# EAGLE board CT_schematic (EAGLE 7.6.0)

Size 100 x 80 mm. Coordinates in mm from the lower left corner, seen from the top.
Outline: 0,0 100,0 100,80 0,80 0,0
Copper layers (1*16): Top 0.035mm / dielectric 1.5mm / Bottom 0.035mm
Design rules "default": minimum track width 10mil, minimum drill 24mil, track to track 8mil, track to pad 8mil, pad to pad 8mil, via to via 8mil, smd to smd 8mil, copper to edge 40mil, drill to drill 8mil, minimum pad ring 10mil, minimum via ring 8mil, stop-mask expansion 4mil, vias tented up to drill 0mil, thermal gap 10mil

## Footprints (pad centres in the part's own frame; a part is rotated, then mirrored left to right if it is on the bottom)
C0603 = smd 0.8 x 0.8: 1 -0.762,0; 2 0.762,0
C0402 = smd 0.5 x 0.5: 1 -0.508,0; 2 0.508,0
C1210 = smd 1.2 x 2.5: 1 -1.524,0; 2 1.524,0
C0805 = smd 1.2 x 1.3: 1 -1.016,0; 2 1.016,0
C1206 = smd 1.3 x 1.6: 1 -1.524,0; 2 1.524,0
L0603 = smd 0.8 x 0.8: 1 -0.762,0; 2 0.762,0
DR1040 = smd 1.6 x 3.2: 1 -4.458,0; 2 4.458,0
R0603 = smd 0.8 x 0.8: 1 -0.762,0; 2 0.762,0
LQFP144 = smd 0.35 x 1.35: 1 -8.75,-10.625; 2 -8.25,-10.625; 3 -7.75,-10.625; 4 -7.25,-10.625; 5 -6.75,-10.625; 6 -6.25,-10.625; 7 -5.75,-10.625; 8 -5.25,-10.625; 9 -4.75,-10.625; 10 -4.25,-10.625; 11 -3.75,-10.625; 12 -3.25,-10.625; 13 -2.75,-10.62; 14 -2.25,-10.625; 15 -1.75,-10.625; 16 -1.25,-10.625; 17 -0.75,-10.625; 18 -0.25,-10.625; 19 0.25,-10.625; 20 0.75,-10.625; 21 1.25,-10.625; 22 1.75,-10.625; 23 2.25,-10.625; 24 2.75,-10.62; 25 3.25,-10.625; 26 3.75,-10.625; 27 4.25,-10.625; 28 4.75,-10.625; 29 5.25,-10.625; 30 5.75,-10.625; 31 6.25,-10.625; 32 6.75,-10.625; 33 7.25,-10.625; 34 7.75,-10.625; 35 8.25,-10.625; 36 8.75,-10.625; 73 8.75,10.625; 74 8.25,10.625; 75 7.75,10.625; 76 7.25,10.625; 77 6.75,10.625; 78 6.25,10.625; 79 5.75,10.625; 80 5.25,10.625; 81 4.75,10.625; 82 4.25,10.625; 83 3.75,10.625; 84 3.25,10.625; 85 2.75,10.625; 86 2.25,10.625; 87 1.75,10.625; 88 1.25,10.625; 89 0.75,10.625; 90 0.25,10.625; 91 -0.25,10.625; 92 -0.75,10.625; 93 -1.25,10.625; 94 -1.75,10.625; 95 -2.25,10.625; 96 -2.75,10.625; 97 -3.25,10.625; 98 -3.75,10.625; 99 -4.25,10.625; 100 -4.75,10.625; 101 -5.25,10.625; 102 -5.75,10.625; 103 -6.25,10.625; 104 -6.75,10.625; 105 -7.25,10.625; 106 -7.75,10.625; 107 -8.25,10.625; 108 -8.75,10.625 | smd 1.35 x 0.35: 37 10.625,-8.75; 38 10.625,-8.25; 39 10.625,-7.75; 40 10.625,-7.25; 41 10.625,-6.75; 42 10.625,-6.25; 43 10.625,-5.75; 44 10.625,-5.25; 45 10.625,-4.75; 46 10.625,-4.25; 47 10.625,-3.75; 48 10.625,-3.25; 49 10.625,-2.75; 50 10.625,-2.25; 51 10.625,-1.75; 52 10.625,-1.25; 53 10.625,-0.75; 54 10.625,-0.25; 55 10.625,0.25; 56 10.625,0.75; 57 10.625,1.25; 58 10.625,1.75; 59 10.625,2.25; 60 10.625,2.75; 61 10.625,3.25; 62 10.625,3.75; 63 10.625,4.25; 64 10.625,4.75; 65 10.625,5.25; 66 10.625,5.75; 67 10.625,6.25; 68 10.625,6.75; 69 10.625,7.25; 70 10.625,7.75; 71 10.625,8.25; 72 10.625,8.75; 109 -10.625,8.75; 110 -10.625,8.25; 111 -10.625,7.75; 112 -10.625,7.25; 113 -10.625,6.75; 114 -10.625,6.25; 115 -10.625,5.75; 116 -10.625,5.25; 117 -10.625,4.75; 118 -10.625,4.25; 119 -10.625,3.75; 120 -10.625,3.25; 121 -10.625,2.75; 122 -10.625,2.25; 123 -10.625,1.75; 124 -10.625,1.25; 125 -10.625,0.75; 126 -10.625,0.25; 127 -10.625,-0.25; 128 -10.625,-0.75; 129 -10.625,-1.25; 130 -10.625,-1.75; 131 -10.625,-2.25; 132 -10.625,-2.75; 133 -10.625,-3.25; 134 -10.625,-3.75; 135 -10.625,-4.25; 136 -10.625,-4.75; 137 -10.625,-5.25; 138 -10.625,-5.75; 139 -10.625,-6.25; 140 -10.625,-6.75; 141 -10.625,-7.25; 142 -10.625,-7.75; 143 -10.625,-8.25; 144 -10.625,-8.75
SOIC-8 = smd 1.6 x 0.6: 1 -2.7,1.905 | smd 1.55 x 0.6: 2 -2.7,0.635; 3 -2.7,-0.635; 4 -2.7,-1.905; 5 2.7,-1.905; 6 2.7,-0.635; 7 2.7,0.635; 8 2.7,1.905
VFBGA48 = smd 0.35 x 0.35: A1 -1.875,2.625; A2 -1.125,2.625; A3 -0.375,2.625; A4 0.375,2.625; A5 1.125,2.625; A6 1.875,2.625; B1 -1.875,1.875; B2 -1.125,1.875; B3 -0.375,1.875; B4 0.375,1.875; B5 1.125,1.875; B6 1.875,1.875; C1 -1.875,1.125; C2 -1.125,1.125; C3 -0.375,1.125; C4 0.375,1.125; C5 1.125,1.125; C6 1.875,1.125; D1 -1.875,0.375; D2 -1.125,0.375; D3 -0.375,0.375; D4 0.375,0.375; D5 1.125,0.375; D6 1.875,0.375; E1 -1.875,-0.375; E2 -1.125,-0.375; E3 -0.375,-0.375; E4 0.375,-0.375; E5 1.125,-0.375; E6 1.875,-0.375; F1 -1.875,-1.125; F2 -1.125,-1.125; F3 -0.375,-1.125; F4 0.375,-1.125; F5 1.125,-1.125; F6 1.875,-1.125; G1 -1.875,-1.875; G2 -1.125,-1.875; G3 -0.375,-1.875; G4 0.375,-1.875; G5 1.125,-1.875; G6 1.875,-1.875; H1 -1.875,-2.625; H2 -1.125,-2.625; H3 -0.375,-2.625; H4 0.375,-2.625; H5 1.125,-2.625; H6 1.875,-2.625
TST-110-05-T-D-RA = drill 1 pad 1.7 square: 1 0,0 | drill 1 pad 1.7: 2 0,2.54; 3 2.54,0; 4 2.54,2.54; 5 5.08,0; 6 5.08,2.54; 7 7.62,0; 8 7.62,2.54; 9 10.16,0; 10 10.16,2.54; 11 12.7,0; 12 12.7,2.54; 13 15.24,0; 14 15.24,2.54; 15 17.78,0; 16 17.78,2.54; 17 20.32,0; 18 20.32,2.54; 19 22.86,0; 20 22.86,2.54
FCI_10118193-0001LF = smd 0.4 x 1.35: 1 -1.3,2.675; 2 -0.65,2.675; 3 0,2.675; 4 0.65,2.675; 5 1.3,2.675 | smd 1.6 x 1.4: 6 -3.2,2.45; 7 3.2,2.45 | smd 1.9 x 1.9: 8 -1.2,0; 9 1.2,0 | hole 0.5: -3.3,0; 3.3,0
SOT143B = smd 1 x 0.7: 1 -0.75,-1 | smd 0.6 x 0.7: 2 0.95,-1; 3 0.95,1; 4 -0.95,1
QFN-28 = smd 0.813 x 0.305: 1 -2.451,1.5; 2 -2.451,1; 3 -2.451,0.5; 4 -2.451,0; 5 -2.451,-0.5; 6 -2.451,-1; 7 -2.451,-1.5; 15 2.451,-1.5; 16 2.451,-1; 17 2.451,-0.5; 18 2.451,0; 19 2.451,0.5; 20 2.451,1; 21 2.451,1.5 | smd 0.305 x 0.813: 8 -1.5,-2.451; 9 -1,-2.451; 10 -0.5,-2.451; 11 0,-2.451; 12 0.5,-2.451; 13 1,-2.451; 14 1.5,-2.451; 22 1.5,2.451; 23 1,2.451; 24 0.5,2.451; 25 0,2.451; 26 -0.5,2.451; 27 -1,2.451; 28 -1.5,2.451 | smd 3.607 x 3.607: 29 0,0
SJ-43515TS-SMT-TR = smd 2.2 x 3: 1 0.6,-7.4; 4 3.4,-7.4 | smd 3 x 3: 2 12.8,-7.4; 5 17,-3 | smd 2 x 3: 3 5.3,0; 6 2.5,0 | drill 1.8: P$7 4.5,-3.69; P$8 11.54,-3.69
ABLS-12.288MHZ-B4-T = smd 5.6 x 2.8: 1 -3.81,0; 2 5.69,0
ASEK = smd 1.4 x 1: 1 -1.1,-0.8; 2 1.1,-0.8; 3 1.1,0.8; 4 -1.1,0.8
ASFL1 = smd 1.7 x 1.5: 1 -1.27,-1.1; 2 1.27,-1.1; 3 1.27,1.1; 4 -1.27,1.1
TSOT-23-5 = smd 1.3 x 0.62: 1 -1.31,0.95; 2 -1.31,0; 3 -1.31,-0.95; 4 1.31,-0.95; 5 1.31,0.95
DFN8_2X3MC = smd 0.813 x 0.305: 1 -1.398,0.75; 2 -1.398,0.25; 3 -1.398,-0.25; 4 -1.398,-0.75; 5 1.398,-0.75; 6 1.398,-0.25; 7 1.398,0.25; 8 1.398,0.75 | smd 1.753 x 1.549: 9 0,0
JST-2-SMD = smd 1 x 4.6: 1 -1,-3.7; 2 1,-3.7 | smd 1.6 x 3.4: NC1 -3.4,1.5; NC2 3.4,1.5
SON-6 = smd 0.55 x 0.3: 1 -0.355,0.5 | smd 0.52 x 0.3: 2 -0.37,0; 3 -0.37,-0.5; 4 0.37,-0.5; 5 0.37,0; 6 0.37,0.5
SW_4-1437565-2 = smd 1.4 x 2.1: 1 -2.23,4.55; 2 -2.23,-4.55; 3 2.23,4.55; 4 2.23,-4.55
LGM67K-G1J2-24-Z = smd 0.8 x 1.4: A -2,0; C 0,0
NC7SZ125M5X = smd 1.3 x 0.7: 1 -1.3,0.95; 2 -1.3,0; 3 -1.3,-0.95; 4 1.3,-0.95; 5 1.3,0.95

## Placement (x,y rotation side)
C1  1e-06  [C0603]  -74.93,80.01 0 top  (outside the outline)
C2  1e-07  [C0603]  -78.74,80.01 0 top  (outside the outline)
C3  1e-07  [C0603]  -82.55,80.01 0 top  (outside the outline)
C4  1e-07  [C0603]  -15.24,85.09 0 top  (outside the outline)
C5  1e-07  [C0603]  -19.05,85.09 0 top  (outside the outline)
C6  1e-07  [C0603]  -22.86,85.09 0 top  (outside the outline)
C7  1e-07  [C0603]  -26.67,85.09 0 top  (outside the outline)
C8  1e-07  [C0603]  -30.48,85.09 0 top  (outside the outline)
C9  1e-07  [C0603]  -34.29,85.09 0 top  (outside the outline)
C10  1e-07  [C0603]  -38.1,85.09 0 top  (outside the outline)
C11  1e-07  [C0603]  -41.91,85.09 0 top  (outside the outline)
C12  1e-07  [C0603]  -45.72,85.09 0 top  (outside the outline)
C13  1e-07  [C0603]  -49.53,85.09 0 top  (outside the outline)
C14  4.7e-06  [C0603]  -59.69,80.01 0 top  (outside the outline)
C15  2.2e-06  [C0603]  -63.5,80.01 0 top  (outside the outline)
C16  2.2e-06  [C0603]  -67.31,80.01 0 top  (outside the outline)
C17  1e-08  [C0603]  -53.34,85.09 0 top  (outside the outline)
C18  1e-06  [C0603]  -57.15,85.09 0 top  (outside the outline)
C19  1e-07  [C0603]  -60.96,85.09 0 top  (outside the outline)
C20  1e-06  [C0603]  -64.77,85.09 0 top  (outside the outline)
C21  1e-08  [C0402]  -31.75,90.17 0 top  (outside the outline)
C22  1e-08  [C0402]  -35.56,90.17 0 top  (outside the outline)
C23  1e-07  [C0402]  -39.37,90.17 0 top  (outside the outline)
C24  2.2e-06  [C0603]  -71.12,80.01 0 top  (outside the outline)
C25  1e-07  [C0402]  -43.18,90.17 0 top  (outside the outline)
C26  2.2e-05  [C1210]  -76.2,60.96 0 top  (outside the outline)
C27  2.2e-05  [C1210]  -82.55,60.96 0 top  (outside the outline)
C28  1e-09  [C0402]  -46.99,90.17 0 top  (outside the outline)
C29  1e-09  [C0402]  -50.8,90.17 0 top  (outside the outline)
C30  1e-07  [C0402]  -54.61,90.17 0 top  (outside the outline)
C31  1e-07  [C0402]  -58.42,90.17 0 top  (outside the outline)
C32  1e-07  [C0402]  -62.23,90.17 0 top  (outside the outline)
C33  1e-07  [C0402]  -66.04,90.17 0 top  (outside the outline)
C34  1e-07  [C0402]  -69.85,90.17 0 top  (outside the outline)
C35  1e-05  [C0805]  -40.64,68.58 0 top  (outside the outline)
C36  1e-05  [C0805]  -45.72,68.58 0 top  (outside the outline)
C37  1e-05  [C0805]  -50.8,68.58 0 top  (outside the outline)
C38  1e-05  [C0805]  -55.88,68.58 0 top  (outside the outline)
C39  1e-05  [C0805]  -60.96,68.58 0 top  (outside the outline)
C40  2.2e-11  [C0402]  -24.13,90.17 0 top  (outside the outline)
C41  2.2e-11  [C0402]  -27.94,90.17 0 top  (outside the outline)
C42  1e-08  [C0402]  -73.66,90.17 0 top  (outside the outline)
C43  1e-08  [C0402]  -77.47,90.17 0 top  (outside the outline)
C44  1e-05  [C0805]  -66.04,68.58 0 top  (outside the outline)
C45  1e-05  [C0805]  -71.12,68.58 0 top  (outside the outline)
C46  1e-07  [C0402]  -81.28,90.17 0 top  (outside the outline)
C47  1e-05  [C1206]  -16.51,68.58 0 top  (outside the outline)
C48  1e-05  [C1206]  -22.86,68.58 0 top  (outside the outline)
C49  1e-08  [C0402]  -15.24,95.25 0 top  (outside the outline)
C50  1e-08  [C0402]  -19.05,95.25 0 top  (outside the outline)
F1  240.0  [L0603]  -68.58,85.09 0 top  (outside the outline)
I1  2.5e-06  [DR1040]  -19.05,43.18 0 top  (outside the outline)
R2  1000.0  [R0603]  -72.39,85.09 0 top  (outside the outline)
R4  4700.0  [R0603]  -76.2,85.09 0 top  (outside the outline)
R5  10000.0  [R0603]  -36.83,74.93 0 top  (outside the outline)
R6  10000.0  [R0603]  -41.91,74.93 0 top  (outside the outline)
R7  10000.0  [R0603]  -46.99,74.93 0 top  (outside the outline)
R8  10000.0  [R0603]  -52.07,74.93 0 top  (outside the outline)
R9  10000.0  [R0603]  -57.15,74.93 0 top  (outside the outline)
R10  10000.0  [R0603]  -62.23,74.93 0 top  (outside the outline)
R11  10000.0  [R0603]  -67.31,74.93 0 top  (outside the outline)
R12  10000.0  [R0603]  -72.39,74.93 0 top  (outside the outline)
R13  10000.0  [R0603]  -77.47,74.93 0 top  (outside the outline)
R14  10000.0  [R0603]  -82.55,74.93 0 top  (outside the outline)
R15  10000.0  [R0603]  -15.24,80.01 0 top  (outside the outline)
R16  10000.0  [R0603]  -20.32,80.01 0 top  (outside the outline)
R17  10000.0  [R0603]  -25.4,80.01 0 top  (outside the outline)
R18  47000.0  [R0603]  -30.48,80.01 0 top  (outside the outline)
R19  47000.0  [R0603]  -35.56,80.01 0 top  (outside the outline)
R20  47000.0  [R0603]  -40.64,80.01 0 top  (outside the outline)
R21  680.0  [R0603]  -80.01,85.09 0 top  (outside the outline)
R22  220000.0  [R0603]  -21.59,74.93 0 top  (outside the outline)
R23  1000000.0  [R0603]  -16.51,74.93 0 top  (outside the outline)
R24  10000.0  [R0603]  -45.72,80.01 0 top  (outside the outline)
R25  10000.0  [R0603]  -50.8,80.01 0 top  (outside the outline)
R26  9100.0  [R0603]  -15.24,90.17 0 top  (outside the outline)
R27  680000.0  [R0603]  -26.67,74.93 0 top  (outside the outline)
R28  120000.0  [R0603]  -31.75,74.93 0 top  (outside the outline)
R29  2000.0  [R0603]  -19.05,90.17 0 top  (outside the outline)
R30  10000.0  [R0603]  -55.88,80.01 0 top  (outside the outline)
U1  STM32F469ZIT6  [LQFP144]  -24.13,11.43 0 top  (outside the outline)
U2  AT25010B-SSHL-T  [SOIC-8]  -50.8,43.18 0 top  (outside the outline)
U3  AT25040B-SSHL-T  [SOIC-8]  -67.31,43.18 0 top  (outside the outline)
U4  CY62147GE30-45BVXI  [VFBGA48]  -57.15,29.21 0 top  (outside the outline)
U5  TST-110-05-T-D-RA  [TST-110-05-T-D-RA]  -74.93,50.8 0 top  (outside the outline)
U6  10118193-0001LF  [FCI_10118193-0001LF]  -35.56,52.07 0 top  (outside the outline)
U7  prtr5v0u2ax  [SOT143B]  -31.75,95.25 0 top  (outside the outline)
U8  WM8731CLSEFL  [QFN-28]  -68.58,60.96 0 top  (outside the outline)
U9  SJ-43515TS-SMT-TR  [SJ-43515TS-SMT-TR]  -62.23,10.16 0 top  (outside the outline)
U10  SJ-43515TS-SMT-TR  [SJ-43515TS-SMT-TR]  -39.37,33.02 0 top  (outside the outline)
U11  ABLS-12.288MHZ-B4-T  [ABLS-12.288MHZ-B4-T]  -44.45,62.23 0 top  (outside the outline)
U12  ASEK-32.768KHz-ECST  [ASEK]  -29.21,62.23 0 top  (outside the outline)
U13  ASFL1-25MHZ-NCS  [ASFL1]  -26.67,53.34 0 top  (outside the outline)
U14  ltc3406es5  [TSOT-23-5]  -76.2,68.58 0 top  (outside the outline)
U15  MCP73831T-2ACI/MC  [DFN8_2X3MC]  -41.91,93.98 0 top  (outside the outline)
U16  S2B-PH-SM4-TB(LF)(SN)  [JST-2-SMD]  -34.29,44.45 0 top  (outside the outline)
U17  TPS3895ADRYR  [SON-6]  -35.56,93.98 0 top  (outside the outline)
U18  4-1437565-2  [SW_4-1437565-2]  -74.93,29.21 0 top  (outside the outline)
U19  Q65110A2395  [LGM67K-G1J2-24-Z]  -55.88,60.96 0 top  (outside the outline)
U20  nc7sz125m5x  [NC7SZ125M5X]  -27.94,68.58 0 top  (outside the outline)
U21  nc7sz125m5x  [NC7SZ125M5X]  -34.29,68.58 0 top  (outside the outline)

## Library data of the parts
C1-C50 F1 I1 R2 R4-R30 U1-U21 = circuit_tree

## Nets
CLK_CRYSTAL_U8_1: C40.1 U8.1 U11.1
CLK_CRYSTAL_U8_2: C41.1 U8.2 U11.2
CLK_U1_7: U1.7 U12.3
CLK_U1_18: U1.18 U13.3
GND: C1.2 C2.2 C3.2 C4.2 C5.2 C6.2 C7.2 C8.2 C9.2 C10.2 C11.2 C12.2 C13.2 C14.2 C15.2 C16.2 C17.2 C18.2 C19.2 C20.2 C21.2 C22.2 C23.2 C24.2 C25.2 C29.2 C30.2 C31.2 C32.2 C33.2 C34.2 C35.2 C36.2 C37.2 C38.2 C39.2 C40.2 C41.2 C42.2 C43.2 C44.2 C45.1 C45.2 C46.2 C47.2 C48.2 C49.2 C50.2 R2.2 R18.2 R19.2 R20.2 R22.2 R26.2 R28.2 R29.2 U1.15 U1.26 U1.33 U1.55 U1.76 U1.84 U1.105 U1.109 U1.122 U1.129 U2.4 U3.4 U4.D1 U4.E6 U5.4 U5.6 U5.8 U5.10 U5.12 U5.14 U5.16 U5.18 U5.20 U6.5 U6.6 U6.7 U6.8 U6.9 U7.1 U8.4 U8.15 U8.19 U8.25 U8.26 U8.29 U9.1 U10.1 U12.2 U13.2 U14.2 U15.6 U15.9 U16.2 U17.2 U19.C U20.2 U20.3 U21.1 U21.3
INPUT_USBPOWER_5V: C20.1 C47.1 R30.2 U1.103 U6.1 U7.4 U15.1 U15.2
NET_U1_20: R4.1 U1.20 U21.4
NET_U1_28: C17.1 C18.1 F1.1 U1.27 U1.28
NET_U1_43: R7.1 U1.43
NET_U1_65: C15.1 U1.65
NET_U1_81: U1.81
NET_U1_87: U1.87
NET_U1_108: C16.1 U1.108
NET_U1_137: R6.1 U1.137
NET_U1_141: U19.A
NET_U1_142: R5.1 U1.142
NET_U1_144: U18.3 U18.4
NET_U2_3: R8.1 U2.3
NET_U2_7: R10.1 U2.7
NET_U3_3: R11.1 U3.3
NET_U3_7: R13.1 U3.7
NET_U8_9: U8.9
NET_U8_20: C34.1 C39.1 U8.20
NET_U9_2: C27.1 R19.1 U9.2
NET_U9_5: C26.1 R18.1 U9.5
NET_U9_13: C26.2
NET_U9_14: C27.2
NET_U10_5: C28.1 C29.1 R20.1 R21.1 U10.5
NET_U10_21: R21.2
NET_U10_22: C28.2
NET_U14_1: U14.1
NET_U14_3: I1.1 U14.3
NET_U14_5: R22.1 R23.1 U14.5
NET_U14_ATNET_3: I1.2 R23.2
NET_U15_5: R30.1 U15.5
NET_U15_8: R29.1 U15.8
NET_U17_1: R25.1 R26.1 U17.1
NET_U17_3: R27.2 R28.1 U17.3
NET_U17_4: R24.1 U17.4 U20.4 U21.2
NET_U18_1: R2.1 U18.1 U18.2
PROC_FMC_A0: U1.9 U4.A3
PROC_FMC_A1: U1.10 U4.A4
PROC_FMC_A2: U1.11 U4.A5
PROC_FMC_A3: U1.12 U4.B3
PROC_FMC_A4: U1.13 U4.B4
PROC_FMC_A5: U1.14 U4.C3
PROC_FMC_A6: U1.45 U4.C4
PROC_FMC_A7: U1.47 U4.D4
PROC_FMC_A8: U1.48 U4.H2
PROC_FMC_A9: U1.49 U4.H3
PROC_FMC_A10: U1.50 U4.H4
PROC_FMC_A11: U1.51 U4.H5
PROC_FMC_A12: U1.90 U4.G3
PROC_FMC_A13: U1.91 U4.G4
PROC_FMC_A14: U1.92 U4.F3
PROC_FMC_A15: U1.93 U4.F4
PROC_FMC_A16: U1.74 U4.E4
PROC_FMC_A17: U1.75 U4.D3
PROC_FMC_D0: U1.78 U4.B6
PROC_FMC_D1: U1.79 U4.C5
PROC_FMC_D2: U1.116 U4.C6
PROC_FMC_D3: U1.117 U4.D5
PROC_FMC_D4: U1.52 U4.E5
PROC_FMC_D5: U1.53 U4.F5
PROC_FMC_D6: U1.54 U4.F6
PROC_FMC_D7: U1.57 U4.G6
PROC_FMC_D8: U1.58 U4.B1
PROC_FMC_D9: U1.59 U4.C1
PROC_FMC_D10: U1.60 U4.C2
PROC_FMC_D11: U1.61 U4.D2
PROC_FMC_D12: U1.62 U4.E2
PROC_FMC_D13: U1.71 U4.F2
PROC_FMC_D14: U1.72 U4.F1
PROC_FMC_D15: U1.73 U4.G1
PROC_FMC_NBL0: U1.140 U4.A1
PROC_FMC_NE2: R15.1 U1.125 U4.B5
PROC_FMC_NOE: R14.1 U1.120 U4.A2
PROC_FMC_NWE: R16.1 U1.121 U4.G5
PROC_I2S2_CK: U1.63 U8.7
PROC_I2S2_EXT_SD: U1.23 U8.10
PROC_I2S2_SD: U1.22 U8.8
PROC_I2S2_WS: U1.67 U8.9 U8.11
PROC_SPI1_MISO: U1.37 U3.2
PROC_SPI1_MOSI: U1.38 U3.5
PROC_SPI1_NSS: R12.1 U1.35 U3.1
PROC_SPI1_SCK: U1.36 U3.6
PROC_SPI2_MISO: U1.69 U2.2
PROC_SPI2_MOSI: U1.24 U2.5
PROC_SPI2_NSS: R9.1 U1.139 U2.1
PROC_SPI2_SCK: U1.68 U2.6
PROC_SYS_JTCK_SWCLK: U1.111 U5.9
PROC_SYS_JTDO_SWO: U1.132 U5.13
PROC_SYS_JTMS_SWDIO: U1.107 U5.7
PROC_USB_OTG_FS_DM: U1.105 U6.2 U7.3
PROC_USB_OTG_FS_DP: U1.106 U6.3 U7.2
RST_OUT_U5_SRESET_B: R17.1 U5.15 U20.1
VCC_S1_3V7: C44.1 C48.1 U14.4 U15.3 U15.4 U16.1
VCC_TIER1_3V3: C1.1 C2.1 C3.1 C4.1 C5.1 C6.1 C7.1 C8.1 C9.1 C10.1 C11.1 C12.1 C13.1 C14.1 C19.1 C21.1 C22.1 C23.1 C24.1 C25.1 C30.1 C31.1 C32.1 C33.1 C35.1 C36.1 C37.1 C38.1 C42.1 C43.1 C45.2 C46.1 C49.1 C50.1 F1.2 I1.2 R4.2 R5.2 R6.2 R7.2 R8.2 R9.2 R10.2 R11.2 R12.2 R13.2 R14.2 R15.2 R16.2 R17.2 R23.2 R24.2 R25.2 R27.1 U1.5 U1.16 U1.25 U1.34 U1.46 U1.56 U1.66 U1.77 U1.80 U1.97 U1.110 U1.123 U1.130 U1.143 U2.8 U3.8 U4.D6 U4.E1 U5.1 U8.3 U8.5 U8.12 U8.18 U12.4 U13.4 U17.6 U20.5 U21.5

## Tracks (layer width: path | path; a pad name or v marks a point on that pad's centre or on a via)
CLK_CRYSTAL_U8_1  (2 unrouted)
CLK_CRYSTAL_U8_2  (2 unrouted)
CLK_U1_7  (1 unrouted)
CLK_U1_18  (1 unrouted)
GND  (104 unrouted)
INPUT_USBPOWER_5V  (7 unrouted)
NET_U1_20  (2 unrouted)
NET_U1_28  (4 unrouted)
NET_U1_43  (1 unrouted)
NET_U1_65  (1 unrouted)
NET_U1_108  (1 unrouted)
NET_U1_137  (1 unrouted)
NET_U1_142  (1 unrouted)
NET_U1_144  (1 unrouted)
NET_U2_3  (1 unrouted)
NET_U2_7  (1 unrouted)
NET_U3_3  (1 unrouted)
NET_U3_7  (1 unrouted)
NET_U8_20  (2 unrouted)
NET_U9_2  (2 unrouted)
NET_U9_5  (2 unrouted)
NET_U10_5  (4 unrouted)
NET_U14_3  (1 unrouted)
NET_U14_5  (2 unrouted)
NET_U14_ATNET_3  (1 unrouted)
NET_U15_5  (1 unrouted)
NET_U15_8  (1 unrouted)
NET_U17_1  (2 unrouted)
NET_U17_3  (2 unrouted)
NET_U17_4  (3 unrouted)
NET_U18_1  (2 unrouted)
PROC_FMC_A0  (1 unrouted)
PROC_FMC_A1  (1 unrouted)
PROC_FMC_A2  (1 unrouted)
PROC_FMC_A3  (1 unrouted)
PROC_FMC_A4  (1 unrouted)
PROC_FMC_A5  (1 unrouted)
PROC_FMC_A6  (1 unrouted)
PROC_FMC_A7  (1 unrouted)
PROC_FMC_A8  (1 unrouted)
PROC_FMC_A9  (1 unrouted)
PROC_FMC_A10  (1 unrouted)
PROC_FMC_A11  (1 unrouted)
PROC_FMC_A12  (1 unrouted)
PROC_FMC_A13  (1 unrouted)
PROC_FMC_A14  (1 unrouted)
PROC_FMC_A15  (1 unrouted)
PROC_FMC_A16  (1 unrouted)
PROC_FMC_A17  (1 unrouted)
PROC_FMC_D0  (1 unrouted)
PROC_FMC_D1  (1 unrouted)
PROC_FMC_D2  (1 unrouted)
PROC_FMC_D3  (1 unrouted)
PROC_FMC_D4  (1 unrouted)
PROC_FMC_D5  (1 unrouted)
PROC_FMC_D6  (1 unrouted)
PROC_FMC_D7  (1 unrouted)
PROC_FMC_D8  (1 unrouted)
PROC_FMC_D9  (1 unrouted)
PROC_FMC_D10  (1 unrouted)
PROC_FMC_D11  (1 unrouted)
PROC_FMC_D12  (1 unrouted)
PROC_FMC_D13  (1 unrouted)
PROC_FMC_D14  (1 unrouted)
PROC_FMC_D15  (1 unrouted)
PROC_FMC_NBL0  (1 unrouted)
PROC_FMC_NE2  (2 unrouted)
PROC_FMC_NOE  (2 unrouted)
PROC_FMC_NWE  (2 unrouted)
PROC_I2S2_CK  (1 unrouted)
PROC_I2S2_EXT_SD  (1 unrouted)
PROC_I2S2_SD  (1 unrouted)
PROC_I2S2_WS  (2 unrouted)
PROC_SPI1_MISO  (1 unrouted)
PROC_SPI1_MOSI  (1 unrouted)
PROC_SPI1_NSS  (2 unrouted)
PROC_SPI1_SCK  (1 unrouted)
PROC_SPI2_MISO  (1 unrouted)
PROC_SPI2_MOSI  (1 unrouted)
PROC_SPI2_NSS  (2 unrouted)
PROC_SPI2_SCK  (1 unrouted)
PROC_SYS_JTCK_SWCLK  (1 unrouted)
PROC_SYS_JTDO_SWO  (1 unrouted)
PROC_SYS_JTMS_SWDIO  (1 unrouted)
PROC_USB_OTG_FS_DM  (2 unrouted)
PROC_USB_OTG_FS_DP  (2 unrouted)
RST_OUT_U5_SRESET_B  (2 unrouted)
VCC_S1_3V7  (5 unrouted)
VCC_TIER1_3V3  (81 unrouted)